# EAGLE board Layout PCB minilab (EAGLE 9.7.0)
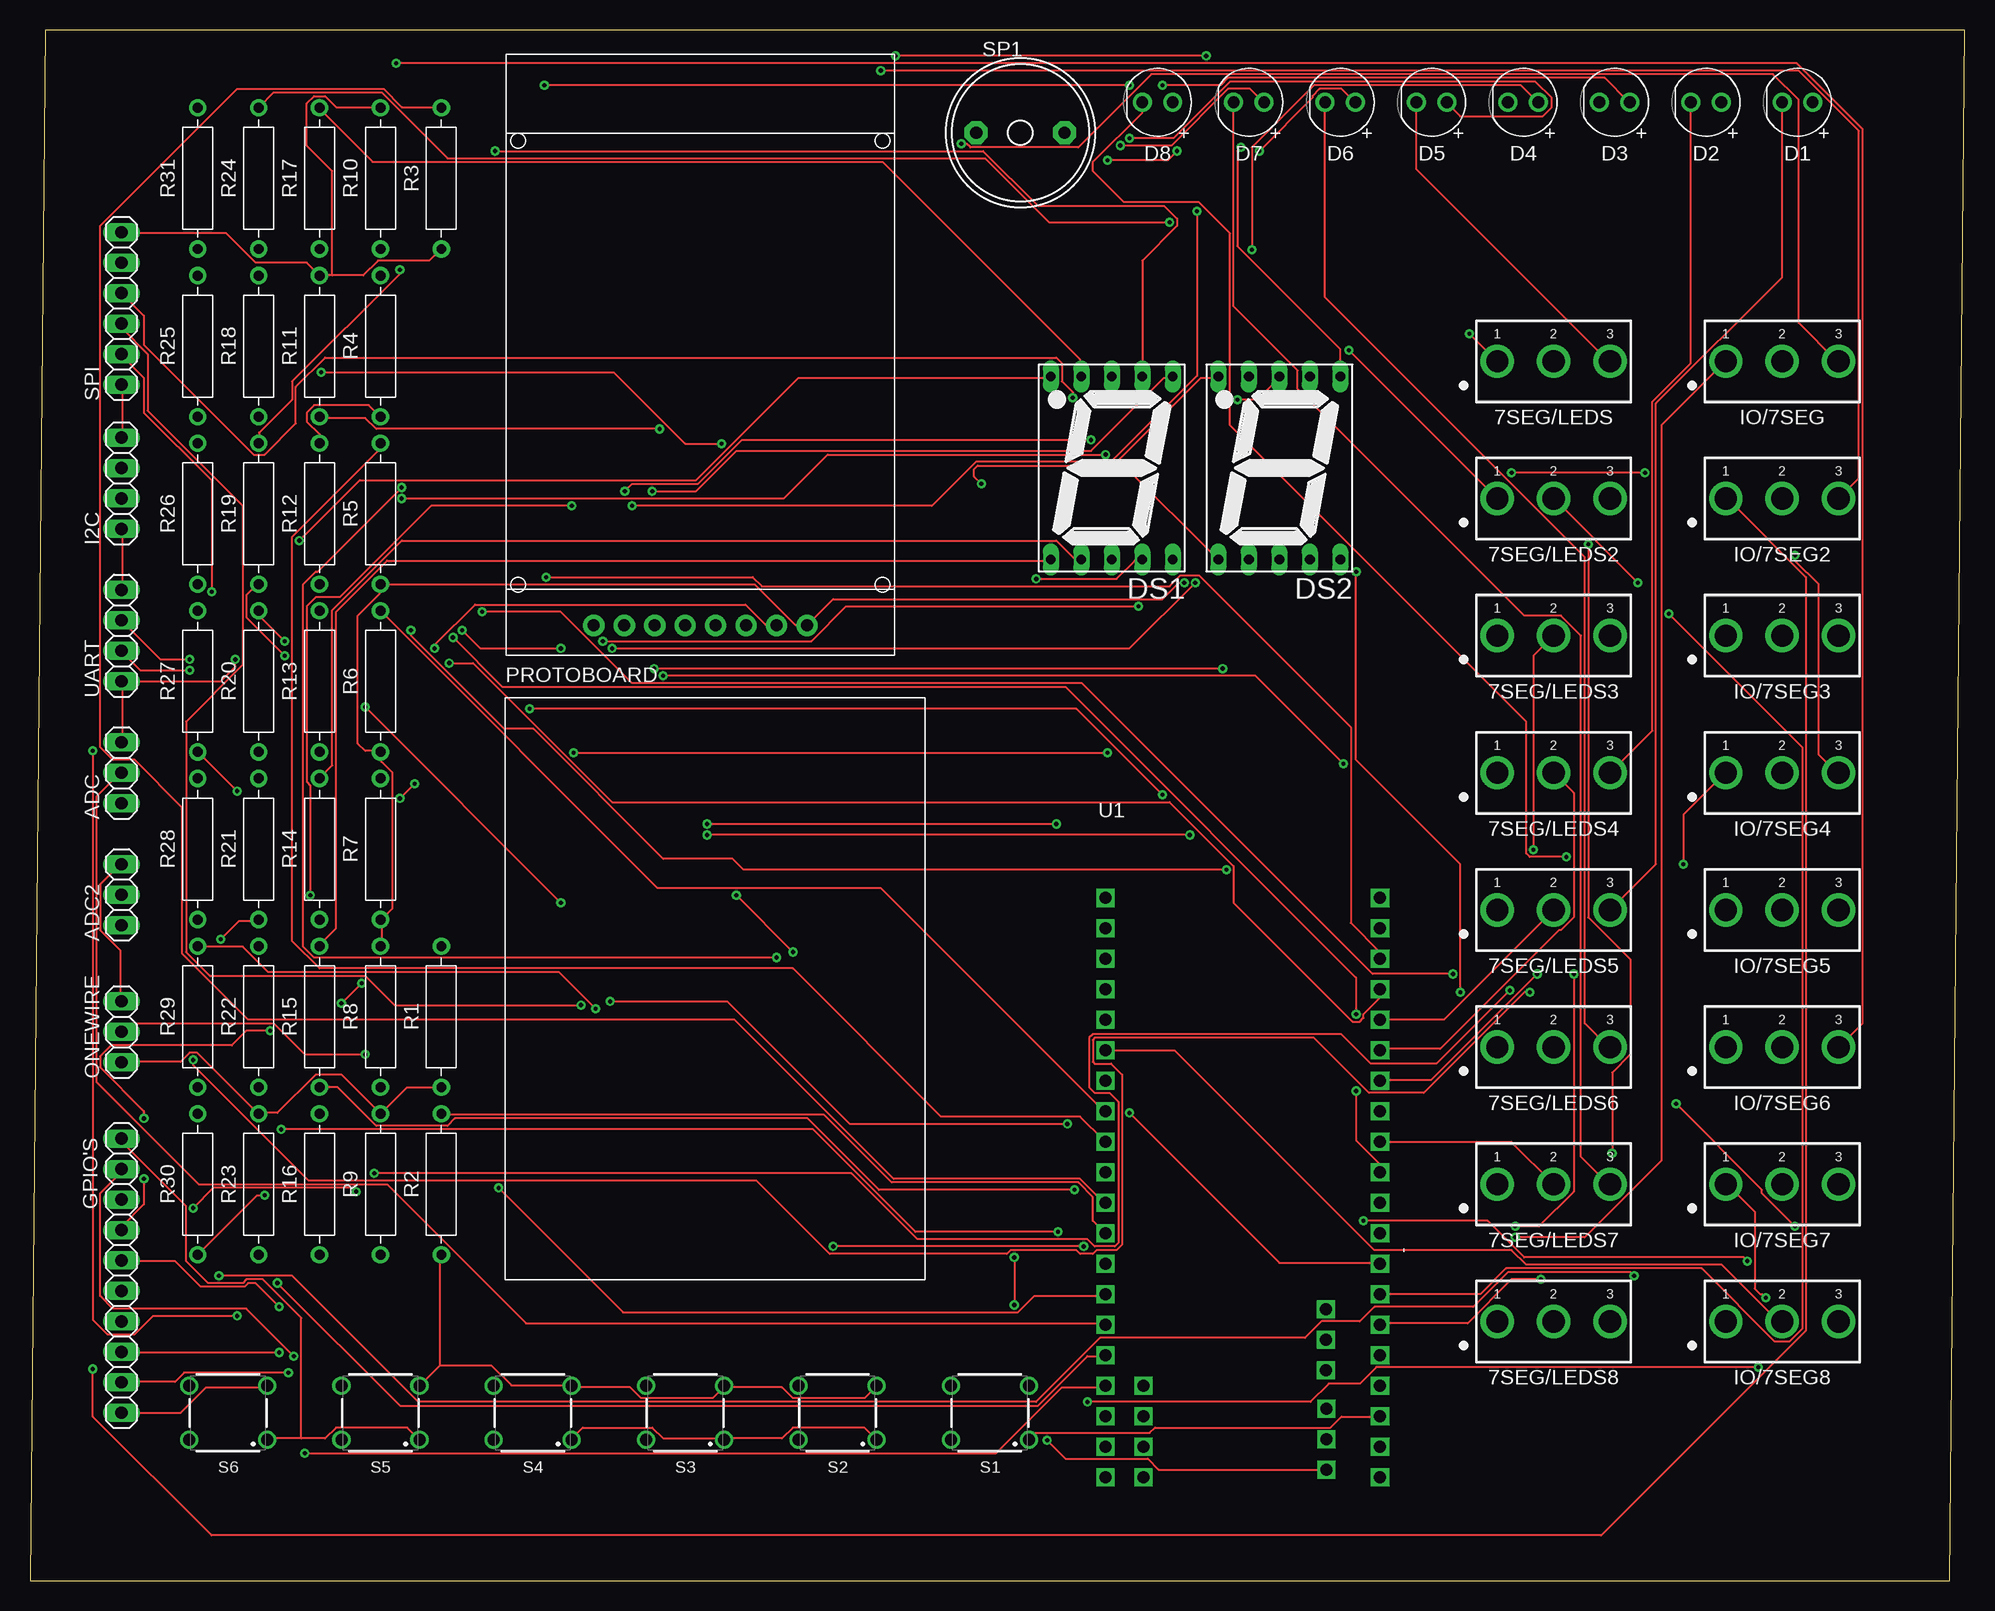
[diagram p0: board, top side]
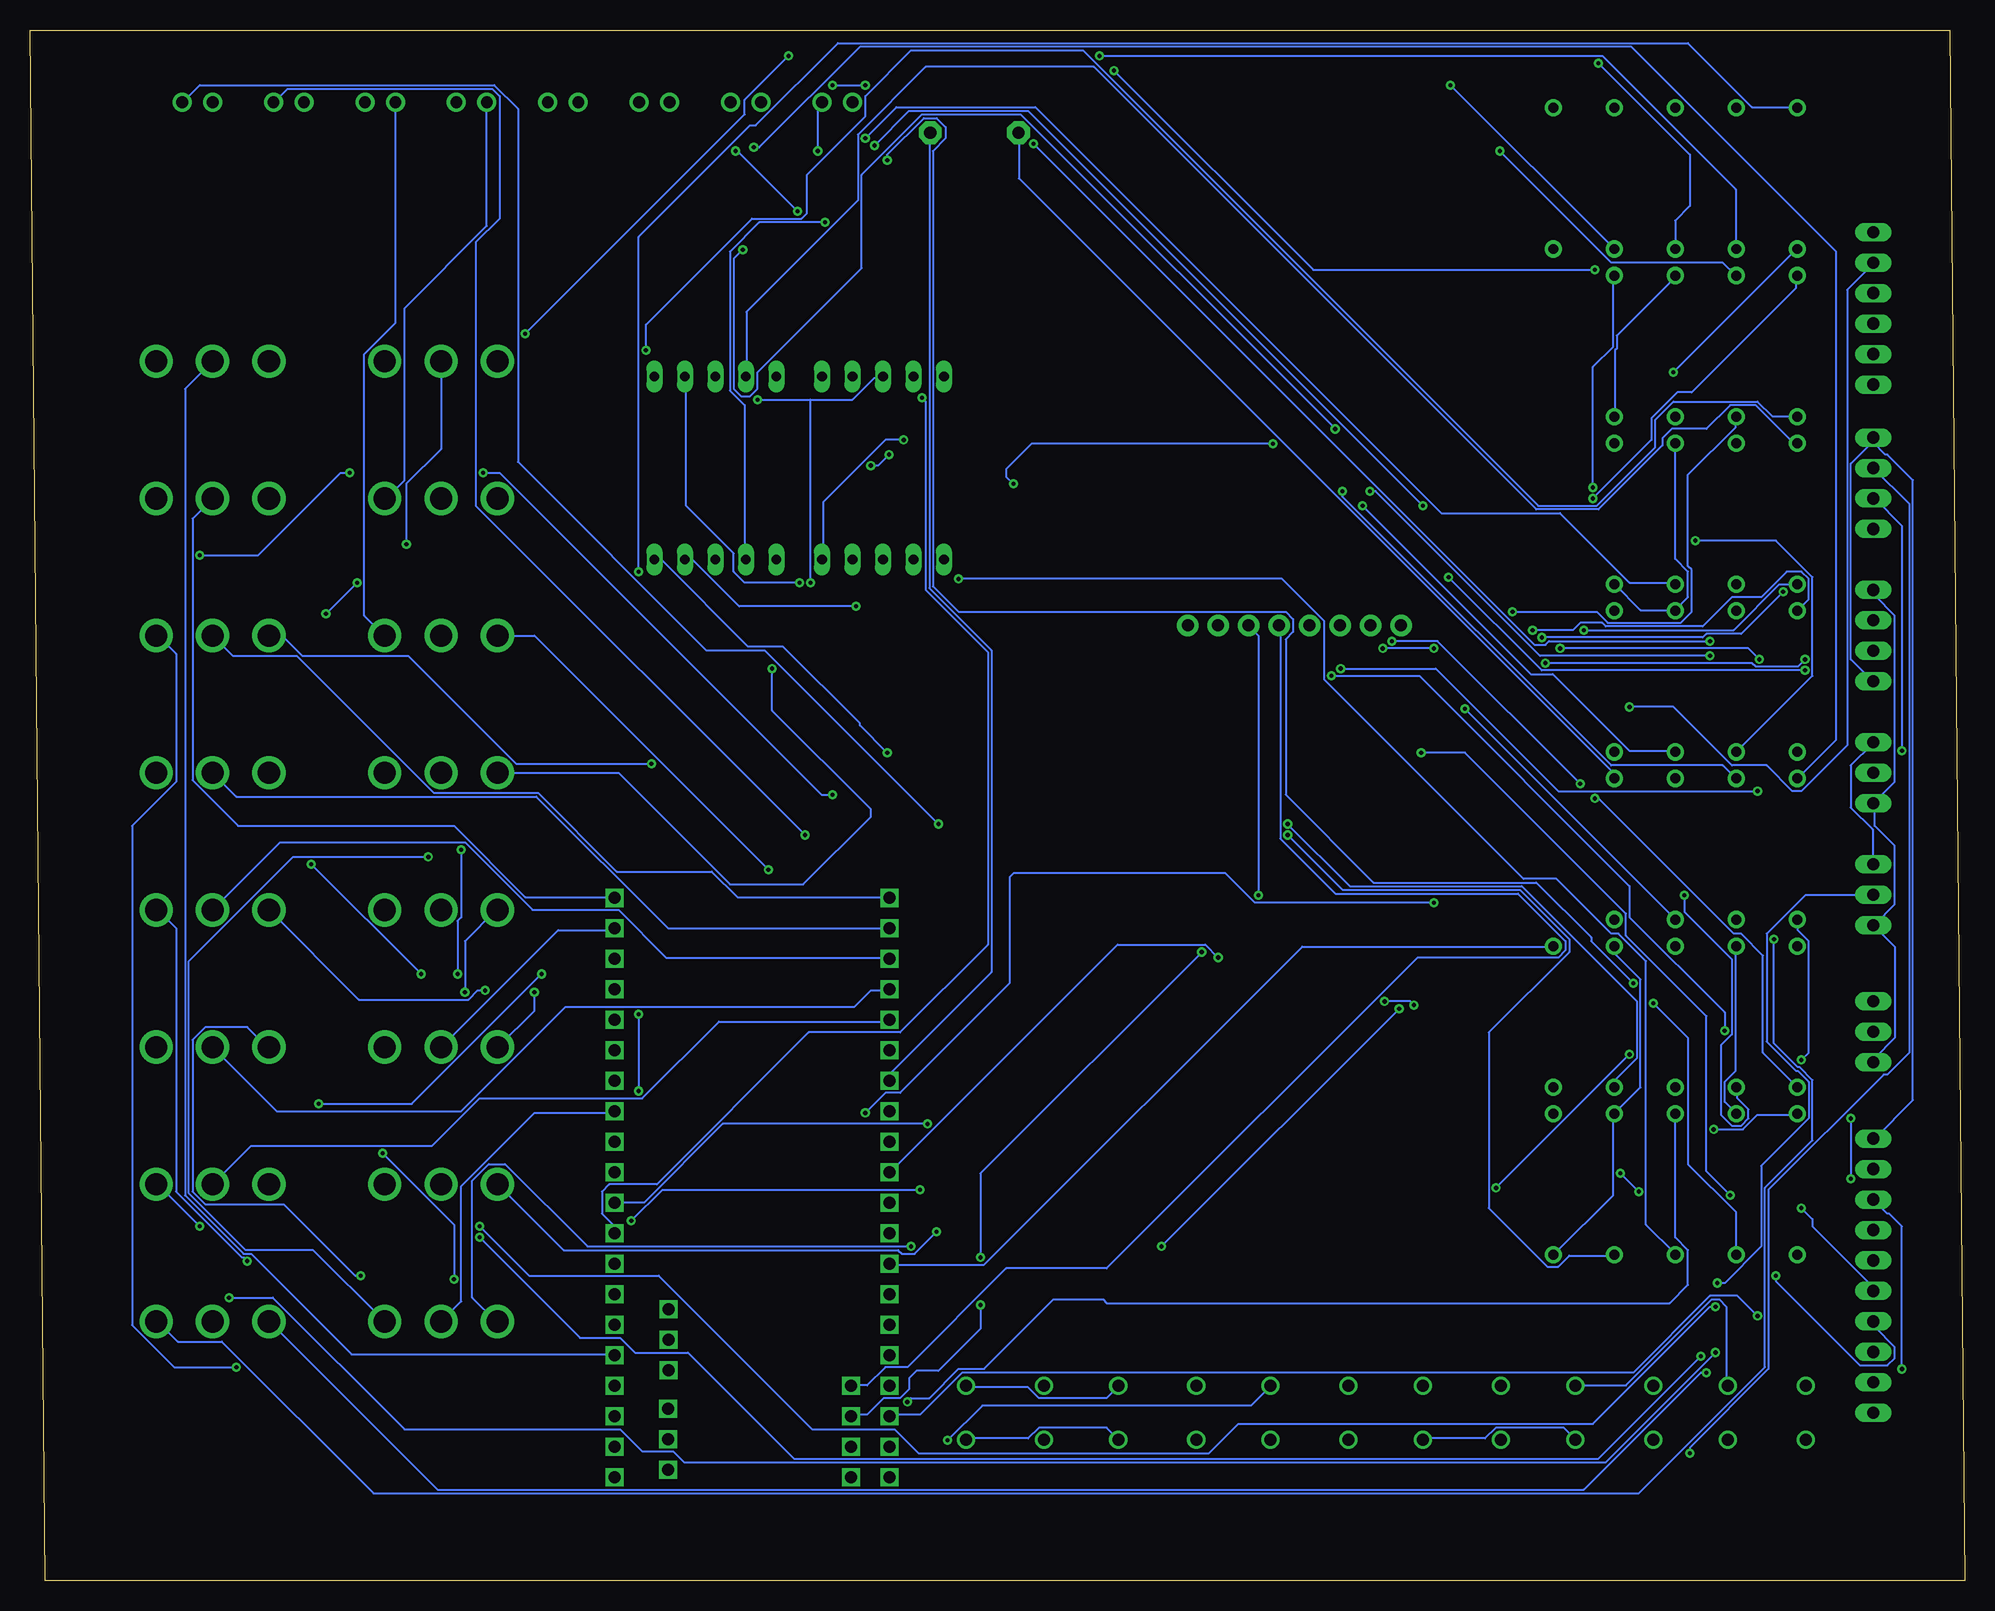
[diagram p1: board, bottom side, seen from below]

Size 161.27 x 129.21 mm. Coordinates in mm from the lower left corner, seen from the top.
Outline: 0,0 160,0 161.27,129.21 1.27,129.21 0,0
Copper layers (1*16): Top / Bottom
Stack-up Default Layer Stack: Top User Defined 0.035mm / Dielectric-1 User Defined 1.5mm / Bottom User Defined 0.035mm
Design rules "default": minimum track width 6mil, minimum drill 0.35mm, track to track 6mil, track to pad 6mil, pad to pad 6mil, via to via 6mil, smd to smd 6mil, copper to edge 40mil, drill to drill 6mil, minimum pad ring 10mil, minimum via ring 8mil, stop-mask expansion 4mil, vias tented up to drill 0mil, thermal gap 10mil

## Footprints (pad centres in the part's own frame; a part is rotated, then mirrored left to right if it is on the bottom)
472123010111 = drill 1.85: 1 4.7,0; 2 0,0; 3 -4.7,0
1X03 = drill 1.016 long: 1 -2.54,0; 2 0,0; 3 2.54,0
LEDRD254W60D565H860B = drill 0.981 pad 1.581: 1 -1.27,0; 2 1.27,0
7SEG-13 = drill 0.813 long: 1 -5.08,-7.62; 2 -2.54,-7.62; 3 0,-7.62; 4 2.54,-7.62; 5 5.08,-7.62; 6 5.08,7.62; 7 2.54,7.62; 8 0,7.62; 9 -2.54,7.62; 10 -5.08,7.62
1X10 = drill 1.016 long: 1 -11.43,0; 2 -8.89,0; 3 -6.35,0; 4 -3.81,0; 5 -1.27,0; 6 1.27,0; 7 3.81,0; 8 6.35,0; 9 8.89,0; 10 11.43,0
1X04 = drill 1.016 long: 1 -3.81,0; 2 -1.27,0; 3 1.27,0; 4 3.81,0
RESAD1176W63L850D250B = drill 0.83 pad 1.43: 1 -5.88,0; 2 5.88,0
4301X60507X6 = drill 1: 1 -3.25,2.25; 2 -3.25,-2.25; 3 3.25,2.25; 4 3.25,-2.25
AL11P = drill 1.016 pad 1.905 octagon: + 3.683,0; - -3.683,0
1X06 = drill 1.016 long: 1 -6.35,0; 2 -3.81,0; 3 -1.27,0; 4 1.27,0; 5 3.81,0; 6 6.35,0
FOOTPRINT-FRANZININHO = drill 1 square: P$1 -12.43,17.51; P$2 -12.43,14.97; P$3 -12.43,12.43; P$4 -12.43,9.89; P$5 -12.43,7.35; P$6 -12.43,4.81; P$7 -12.43,2.27; P$8 -12.43,-0.27; P$9 -12.43,-2.81; P$10 -12.43,-5.35; P$11 -12.43,-7.89; P$12 -12.43,-10.43; P$13 -12.43,-12.97; P$14 -12.43,-15.51; P$15 -12.43,-18.05; P$16 -12.43,-20.59; P$17 -12.43,-23.13; P$18 -12.43,-25.67; P$19 -12.43,-28.21; P$20 -12.43,-30.75; P$21 10.48,17.51; P$22 10.48,14.97; P$23 10.48,12.43; P$24 10.48,9.89; P$25 10.48,7.35; P$26 10.48,4.81; P$27 10.48,2.27; P$28 10.48,-0.27; P$29 10.48,-2.81; P$30 10.48,-5.35; P$31 10.48,-7.89; P$32 10.48,-10.43; P$33 10.48,-12.97; P$34 10.48,-15.51; P$35 10.48,-18.05; P$36 10.48,-20.59; P$37 10.48,-23.13; P$38 10.48,-25.67; P$39 10.48,-28.21; P$40 10.48,-30.75; P$41 -9.24,-23.13; P$42 -9.24,-25.67; P$43 -9.24,-28.21; P$44 -9.24,-30.75; P$45 6.01,-25.07; P$46 6.01,-27.61; P$47 6.01,-30.15; P$48 5.97,-16.78; P$49 5.97,-19.32; P$50 5.97,-21.86
1.44-TFT-V1.1 = drill 1 pad 1.778: BLK 0,17.78; CS 0,15.24; DC 0,12.7; GND 0,0; RESET 0,10.16; SCL 0,5.08; SDA 0,7.62; VCC 0,2.54

## Placement (x,y rotation side)
7SEG/LEDS  472123010111  [472123010111]  127,101.6 180 top
7SEG/LEDS2  472123010111  [472123010111]  127,90.17 180 top
7SEG/LEDS3  472123010111  [472123010111]  127,78.74 180 top
7SEG/LEDS4  472123010111  [472123010111]  127,67.31 180 top
7SEG/LEDS5  472123010111  [472123010111]  127,55.88 180 top
7SEG/LEDS6  472123010111  [472123010111]  127,44.45 180 top
7SEG/LEDS7  472123010111  [472123010111]  127,33.02 180 top
7SEG/LEDS8  472123010111  [472123010111]  127,21.59 180 top
ADC  PINHD-1X3  [1X03]  7.62,67.31 90 top
ADC2  PINHD-1X3  [1X03]  7.62,57.15 90 top
D1  LED_RED  [LEDRD254W60D565H860B]  147.32,123.19 180 top
D2  LED_RED  [LEDRD254W60D565H860B]  139.7,123.19 180 top
D3  LED_RED  [LEDRD254W60D565H860B]  132.08,123.19 180 top
D4  LED_RED  [LEDRD254W60D565H860B]  124.46,123.19 180 top
D5  LED_RED  [LEDRD254W60D565H860B]  116.84,123.19 180 top
D6  LED_RED  [LEDRD254W60D565H860B]  109.22,123.19 180 top
D7  LED_RED  [LEDRD254W60D565H860B]  101.6,123.19 180 top
D8  LED_RED  [LEDRD254W60D565H860B]  93.98,123.19 180 top
DS1  7SEG-CK  [7SEG-13]  90.17,92.71 180 top
DS2  7SEG-CK  [7SEG-13]  104.14,92.71 180 top
GPIO'S  PINHD-1X10  [1X10]  7.62,25.4 270 top
I2C  PINHD-1X4  [1X04]  7.62,91.44 90 top
IO/7SEG  472123010111  [472123010111]  146.05,101.6 180 top
IO/7SEG2  472123010111  [472123010111]  146.05,90.17 180 top
IO/7SEG3  472123010111  [472123010111]  146.05,78.74 180 top
IO/7SEG4  472123010111  [472123010111]  146.05,67.31 180 top
IO/7SEG5  472123010111  [472123010111]  146.05,55.88 180 top
IO/7SEG6  472123010111  [472123010111]  146.05,44.45 180 top
IO/7SEG7  472123010111  [472123010111]  146.05,33.02 180 top
IO/7SEG8  472123010111  [472123010111]  146.05,21.59 180 top
ONEWIRE  PINHD-1X3  [1X03]  7.62,45.72 90 top
PROTOBOARD  MINI-PROTOBOARD  [PROTOBOARDFOOTPRINT]  54.61,68.58 0 top
R1  [RESAD1176W63L850D250B]  34.29,46.99 90 top
R2  [RESAD1176W63L850D250B]  34.29,33.02 90 top
R3  [RESAD1176W63L850D250B]  34.29,116.84 90 top
R4  [RESAD1176W63L850D250B]  29.21,102.87 90 top
R5  [RESAD1176W63L850D250B]  29.21,88.9 90 top
R6  [RESAD1176W63L850D250B]  29.21,74.93 90 top
R7  [RESAD1176W63L850D250B]  29.21,60.96 90 top
R8  [RESAD1176W63L850D250B]  29.21,46.99 90 top
R9  [RESAD1176W63L850D250B]  29.21,33.02 90 top
R10  [RESAD1176W63L850D250B]  29.21,116.84 90 top
R11  [RESAD1176W63L850D250B]  24.13,102.87 90 top
R12  [RESAD1176W63L850D250B]  24.13,88.9 90 top
R13  [RESAD1176W63L850D250B]  24.13,74.93 90 top
R14  [RESAD1176W63L850D250B]  24.13,60.96 90 top
R15  [RESAD1176W63L850D250B]  24.13,46.99 90 top
R16  [RESAD1176W63L850D250B]  24.13,33.02 90 top
R17  [RESAD1176W63L850D250B]  24.13,116.84 90 top
R18  [RESAD1176W63L850D250B]  19.05,102.87 90 top
R19  [RESAD1176W63L850D250B]  19.05,88.9 90 top
R20  [RESAD1176W63L850D250B]  19.05,74.93 90 top
R21  [RESAD1176W63L850D250B]  19.05,60.96 90 top
R22  [RESAD1176W63L850D250B]  19.05,46.99 90 top
R23  [RESAD1176W63L850D250B]  19.05,33.02 90 top
R24  [RESAD1176W63L850D250B]  19.05,116.84 90 top
R25  [RESAD1176W63L850D250B]  13.97,102.87 90 top
R26  [RESAD1176W63L850D250B]  13.97,88.9 90 top
R27  [RESAD1176W63L850D250B]  13.97,74.93 90 top
R28  [RESAD1176W63L850D250B]  13.97,60.96 90 top
R29  [RESAD1176W63L850D250B]  13.97,46.99 90 top
R30  [RESAD1176W63L850D250B]  13.97,33.02 90 top
R31  [RESAD1176W63L850D250B]  13.97,116.84 90 top
S1  [4301X60507X6]  80.01,13.97 180 top
S2  [4301X60507X6]  67.31,13.97 180 top
S3  [4301X60507X6]  54.61,13.97 180 top
S4  [4301X60507X6]  41.91,13.97 180 top
S5  [4301X60507X6]  29.21,13.97 180 top
S6  [4301X60507X6]  16.51,13.97 180 top
SP1  AL11P  [AL11P]  82.55,120.65 0 top
SPI  PINHD-1X6  [1X06]  7.62,106.02 90 top
U1  FRANZININHOWIFI  [FOOTPRINT-FRANZININHO]  102.06,39.37 0 top
U$1  1.44"-TFT-V1.1  [1.44-TFT-V1.1]  64.77,79.6 90 top
UART  PINHD-1X4  [1X04]  7.62,78.74 90 top

## Library data of the parts
7SEG/LEDS 7SEG/LEDS2-7SEG/LEDS8 IO/7SEG IO/7SEG2-IO/7SEG8 = Wurth_Switch_WS-TOTV; ACTUATOR-LENGTH: 10.7mm; BUSHING-LENGTH: 9mm; DATASHEET-URL: https://www.we-online.com/redexpert/spec/472123010111?ae; MOUNT: THT; PART-NUMBER: 472123010111; SWITCHING-FUNCTION: ON-OFF-ON
ADC ADC2 GPIO'S I2C ONEWIRE SPI UART = Connector; CATEGORY: CONNECTOR; SUB-CATEGORY: PIN-HEADER
D1-D8 = Opto-Electronic; CATEGORY: Opto-Electronic; SUB-CATEGORY: LED
DS1 DS2 = Opto-Electronic; CATEGORY: Opto-Electronic; SUB-CATEGORY: Display; TYPE: 7-Segment
PROTOBOARD = MiniProtoboardLibrary
R1-R31 = Resistor; CATEGORY: Resistor; SUB-CATEGORY: Fixed
S1-S6 = Wurth_Switch_WS-TATV; DATASHEET-URL: https://www.we-online.com/catalog/datasheet/430156050726.pdf; H: 5.0mm; OPERATION-FORCE: 260g; PART-NUMBER: 430156050726; QTY: 200
SP1 = buzzer; OC_FARNELL: unknown; OC_NEWARK: unknown
U1 = Biblioteca Franzininho
U$1 = Biblioteca LCD

## Nets
3V3: U1.P$19
3V3_MALE: U1.P$43
5V_MALE: U1.P$48
5V_MALE1: U1.P$45
GND: U1.P$20
GND1: U1.P$39
GND2: U1.P$40
GND_MALE: U1.P$44
GND_MALE1: U1.P$49
GND_MALE2: U1.P$50
GND_MALE3: U1.P$46
N$1: R7.2 SP1.-
N$2: ADC2.1 ADC.1 DS1.3 DS2.3 GPIO'S.10 I2C.1 ONEWIRE.1 R1.1 R2.1 R3.1 R4.1 R5.1 R6.1 R7.1 R8.2 R9.2 R10.2 R11.2 R12.2 R13.2 R22.2 R23.2 S1.2 S2.2 S3.2 S4.2 S5.2 S6.2 SPI.6 U1.P$47 U$1.GND UART.4
N$3: R6.2 U1.P$8
N$4: 7SEG/LEDS4.2 U1.P$26
N$5: 7SEG/LEDS3.2 U1.P$27
N$6: R5.2 U1.P$9
N$7: 7SEG/LEDS.2 U1.P$35
N$8: 7SEG/LEDS2.2 U1.P$34
N$9: 7SEG/LEDS6.2 U1.P$22
N$10: R4.2 U1.P$10
N$11: R3.2 U1.P$11
N$12: R2.2 U1.P$12
N$13: R1.2 U1.P$13
N$14: U1.P$41 U$1.SDA
N$15: I2C.3 U1.P$17
N$16: ADC2.2 U1.P$16
N$17: 7SEG/LEDS5.2 U1.P$25
N$18: D1.1 R8.1
N$19: D2.1 R9.1
N$20: D3.1 R10.1
N$21: D4.1 R11.1
N$22: D5.1 R12.1
N$23: D6.1 R13.1
N$24: I2C.2 U1.P$18
N$25: U1.P$24 UART.3
N$26: U1.P$23 UART.2
N$27: SPI.2 U1.P$30
N$28: SPI.3 U1.P$31
N$29: SPI.4 U1.P$32
N$30: SPI.5 U1.P$33
N$31: D8.1 R23.1
N$32: ADC.2 U1.P$15
N$33: ONEWIRE.2 U1.P$14
N$34: SP1.+ U1.P$7
N$35: DS1.7 R14.2
N$36: IO/7SEG8.2 U1.P$6
N$37: IO/7SEG7.2 U1.P$5
N$38: DS1.6 R15.2
N$39: IO/7SEG3.2 U1.P$1
N$40: IO/7SEG6.2 U1.P$4
N$41: IO/7SEG5.2 U1.P$3
N$42: DS1.4 R17.2
N$43: DS1.2 R18.2
N$44: DS1.1 R21.2
N$45: IO/7SEG4.2 U1.P$2
N$46: DS1.9 R16.1
N$47: DS1.10 R19.1
N$48: IO/7SEG2.2 U1.P$21
N$49: DS1.5 R20.1
N$50: IO/7SEG.2 U1.P$36
N$51: ADC2.3 ADC.3 GPIO'S.1 I2C.4 ONEWIRE.3 S1.1 S2.1 S3.1 S4.1 S5.1 S6.1 SPI.1 U1.P$38 U$1.VCC UART.1
N$52: D7.1 R22.1
N$53: 7SEG/LEDS7.2 U1.P$29
N$54: 7SEG/LEDS8.2 U1.P$28
N$55: 7SEG/LEDS8.3 D8.2
N$56: DS2.2 R27.2
N$57: DS2.4 R26.2
N$58: DS2.6 R25.2
N$59: DS2.7 R24.2
N$60: DS2.1 R28.2
N$61: DS2.9 R29.1
N$62: DS2.10 R30.1
N$63: DS2.5 R31.1
N$64: 7SEG/LEDS.1 R24.1
N$65: 7SEG/LEDS2.1 R25.1
N$66: 7SEG/LEDS3.1 R26.1
N$67: 7SEG/LEDS4.1 R27.1
N$68: 7SEG/LEDS5.1 R28.1
N$69: 7SEG/LEDS6.1 R31.2
N$70: 7SEG/LEDS7.1 R30.2
N$71: 7SEG/LEDS8.1 R29.2
N$72: 7SEG/LEDS7.3 D7.2
N$73: 7SEG/LEDS6.3 D6.2
N$75: 7SEG/LEDS5.3 D1.2
N$76: 7SEG/LEDS4.3 D2.2
N$77: 7SEG/LEDS3.3 D3.2
N$78: 7SEG/LEDS2.3 D4.2
N$79: 7SEG/LEDS.3 D5.2
N$80: IO/7SEG7.3 R18.1
N$81: IO/7SEG6.3 R17.1
N$82: IO/7SEG5.3 R15.1
N$83: IO/7SEG4.3 R14.1
N$84: IO/7SEG8.3 R21.1
N$85: GPIO'S.9 IO/7SEG8.1
N$86: GPIO'S.8 IO/7SEG7.1
N$87: GPIO'S.7 IO/7SEG6.1
N$88: GPIO'S.6 IO/7SEG5.1
N$89: GPIO'S.5 IO/7SEG4.1
N$90: IO/7SEG3.3 R16.2
N$91: IO/7SEG2.3 R19.2
N$92: IO/7SEG.3 R20.2
N$93: GPIO'S.4 IO/7SEG3.1
N$94: GPIO'S.3 IO/7SEG2.1
N$95: GPIO'S.2 IO/7SEG.1
N$96: U1.P$42 U$1.SCL

## Tracks (layer width: path | path; a pad name or v marks a point on that pad's centre or on a via)
N$1
  Bottom 0.152: R7.2 29.31,66.85 29.31,67.31 78.84,116.84 78.84,120.65 SP1.-
N$2  (via drill 0.35)
  Top 0.152: R12.2 24.13,95.5 23.06,96.57 23.06,97.33 23.67,97.94 28.25,97.94 29.16,97.03 R4.1 | 25.2,108.76 27.79,108.76 29.01,109.98 33.27,109.98 34.19,110.9 R3.1 | 25.2,108.76 24.13,108.76 | 25.2,108.76 25.2,117.45 23.06,119.58 23.06,123.09 23.67,123.7 24.59,123.7 25.5,122.78 29.16,122.78 R10.2 | 24.13,108.76 23.06,109.83 18.8,109.83 16.36,112.27 7.67,112.27 SPI.6 | 24.13,108.76 R11.2 | v100.63,98.4 102.31,98.4 104.14,100.23 DS2.3 | v96.21,83.16 95.76,83.16 94.39,81.79 66.95,81.79 64.82,79.65 U$1.GND 64.67,79.65 63.75,79.65 60.4,83.01 29.31,83.01 R5.1 29.16,83.01 29.16,82.25 27.33,80.42 27.33,69.75 27.94,69.14 29.16,69.14 R6.1 29.31,68.99 29.31,68.22 30.23,67.31 30.23,56.03 29.31,55.12 R7.1 29.31,54.97 29.31,52.98 R8.2 | UART.4 7.67,82.55 7.67,87.58 I2C.1 | R1.1 34.19,41.1 31.45,41.1 29.31,38.96 R9.2 29.16,38.96 25.96,42.16 23.82,42.16 20.62,38.96 19.1,38.96 R23.2 18.95,38.96 13.92,43.99 13.31,43.99 12.55,43.23 7.67,43.23 ONEWIRE.1 | GPIO'S.10 12.55,13.97 14.68,16.1 19.71,16.1 S6.2 | 34.19,17.93 34.19,27.08 R2.1 | 34.19,17.93 32.51,16.26 S5.2 | 34.19,17.93 38.46,17.93 40.13,16.26 45.01,16.26 S4.2 45.16,16.1 50.04,16.1 50.95,15.19 56.9,15.19 57.81,16.1 S3.2 57.96,16.1 62.69,16.1 63.6,15.19 69.55,15.19 70.46,16.1 S2.2 | v84.78,11.68 86.31,10.16 93.17,10.16 94.08,9.25 107.95,9.25 U1.P$47
  Bottom 0.152: R4.1 29.16,97.03 29.16,102.51 29.01,102.67 29.01,103.73 24.13,108.61 R11.2 | v100.63,98.4 96.21,98.4 | 96.21,98.4 92.71,98.4 90.88,100.23 90.27,100.23 DS1.3 | 24.13,80.87 27.03,80.87 29.16,83.01 R5.1 | v96.21,83.16 96.21,98.4 | R12.2 24.13,85.14 23.06,84.07 23.06,81.94 24.13,80.87 | 24.13,80.87 R13.2 | ONEWIRE.1 7.52,43.23 7.52,43.54 5.84,45.21 5.84,52.83 ADC2.1 7.52,54.66 5.84,56.34 5.84,61.21 7.52,62.89 7.52,64.72 ADC.1 5.84,66.55 5.84,80.42 7.52,82.09 7.52,82.55 UART.4 | R22.2 19.1,52.83 19.1,42.47 20.02,41.55 20.02,39.88 19.1,38.96 R23.2 | R8.2 29.16,52.83 29.16,52.22 27.03,50.09 27.03,41.1 29.16,38.96 R9.2 29.31,38.81 29.31,32.11 34.19,27.23 R2.1 | S6.2 19.86,16.26 19.86,22.81 20.47,23.42 21.08,23.42 28.25,16.26 32.36,16.26 S5.2 | S1.2 83.11,16.1 78.08,16.1 77.16,15.19 71.53,15.19 70.61,16.1 S2.2 | v84.78,11.68 81.89,14.58 59.49,14.58 57.96,16.1 S3.2
N$3
  Top 0.152: R6.2 29.31,80.72 52.32,57.71 70.92,57.71 89.51,39.12 U1.P$8
N$4
  Top 0.152: 7SEG/LEDS4.2 128.68,65.63 128.68,55.27 127.61,54.2 127.46,54.2 117.55,44.3 112.67,44.3 U1.P$26
N$5  (via drill 0.35)
  Top 0.152: v125.63,50.55 116.79,41.71 112.67,41.71 U1.P$27 | v125.32,60.91 125.32,77.06 7SEG/LEDS3.2
  Bottom 0.152: v125.63,50.55 125.63,54.97 125.32,55.27 v125.32,60.91
N$6
  Top 0.152: R5.2 29.16,94.74 29.16,94.28 21.84,86.97 21.84,53.29 24.13,51 63.6,51 75.95,38.66 87.53,38.66 89.51,36.68 U1.P$9
N$7  (via drill 0.35)
  Top 0.152: v125.93,25.09 123.49,25.09 119.84,21.44 112.67,21.44 U1.P$35 | v131.88,35.61 131.88,42.32 133.4,43.84 133.4,51.77 129.9,55.27 v129.9,86.36
  Bottom 0.152: v125.93,25.09 125.93,29.67 v131.88,35.61 | v129.9,86.36 129.9,91.39 127,94.28 7SEG/LEDS.2
N$8  (via drill 0.35)
  Top 0.152: v136.6,80.57 147.73,69.44 147.73,20.98 146.66,19.91 145.44,19.91 139.34,26.01 123.04,26.01 120.9,23.88 112.67,23.88 U1.P$34 | 7SEG/LEDS2.2 v134.01,83.16
  Bottom 0.152: v134.01,83.16 v136.6,80.57
N$9
  Bottom 0.152: 7SEG/LEDS6.2 117.25,54.2 112.67,54.2 U1.P$22
N$10  (via drill 0.35)
  Top 0.152: v30.99,91.08 23.98,84.07 23.82,84.07 22.76,83.01 22.76,52.83 23.67,51.92 v62.23,51.92
  Bottom 0.152: v30.99,91.08 30.99,101.14 29.31,102.82 29.31,108.61 R4.2 | v62.23,51.92 63.3,52.98 70.61,52.98 89.51,34.09 U1.P$10
N$11
  Top 0.152: R3.2 34.19,122.78 30.99,122.78 29.46,124.31 17.27,124.31 5.84,112.88 5.84,69.44 6.91,68.38 8.74,68.38 12.7,64.41 12.7,52.22 18.19,46.74 58.73,46.74 71.98,33.48 87.53,33.48 89.51,31.5 U1.P$11
N$12
  Top 0.152: R2.2 34.34,38.81 66.19,38.81 71.83,33.17 87.38,33.17 88.59,31.95 88.59,29.97 89.51,29.06 U1.P$12
N$13
  Bottom 0.152: R1.2 34.34,52.83 55.22,52.83 81.74,26.31 89.51,26.31 U1.P$13
N$14
  Bottom 0.152: U1.P$41 92.71,16.26 91.49,16.26 89.97,17.78 88.14,17.78 79.91,26.01 71.53,26.01 45.62,51.92 33.88,51.92 33.27,52.53 33.27,53.29 37.24,57.25 52.48,57.25 57.05,61.82 57.05,79.5 U$1.SDA
N$15  (via drill 0.35)
  Top 0.152: v22.91,10.62 80.52,10.62 86,16.1 89.51,16.1 U1.P$17
  Bottom 0.152: v22.91,10.62 22.91,11.07 16.36,17.63 16.36,32.56 6.76,42.16 6.45,42.16 4.62,43.99 4.62,89.71 I2C.3
N$16  (via drill 0.35)
  Top 0.152: v20.62,24.79 30.84,14.58 84.02,14.58 88.14,18.69 89.51,18.69 U1.P$16
  Bottom 0.152: v20.62,24.79 20.02,24.79 16.97,27.84 16.97,34.54 13,38.51 13,41.55 13.92,42.47 14.07,42.47 16.51,44.91 16.51,53.9 13.31,57.1 7.67,57.1 ADC2.2
N$17
  Top 0.152: 7SEG/LEDS5.2 117.86,46.74 112.67,46.74 U1.P$25
N$18  (via drill 0.35)
  Top 0.152: v85.55,63.04 v56.44,63.04
  Bottom 0.152: v56.44,63.04 51.26,57.86 36.93,57.86 27.33,48.26 27.33,43.54 29.16,41.71 29.16,41.25 R8.1 | v85.55,63.04 100.02,77.52 104.9,77.52 120.6,93.22 120.6,122.63 122.58,124.61 147.12,124.61 148.49,123.24 D1.1
N$19  (via drill 0.35)
  Top 0.152: v96.67,62.13 v56.44,62.13
  Bottom 0.152: v56.44,62.13 51.87,57.56 37.08,57.56 32.97,53.44 32.97,52.38 39.68,45.67 39.68,31.04 34.8,26.16 33.88,26.16 32.97,27.08 29.31,27.08 R9.1 | v96.67,62.13 124.1,89.56 124.1,111.51 122.12,113.49 122.12,123.7 122.73,124.31 139.8,124.31 140.87,123.24 D2.1
N$20  (via drill 0.35)
  Top 0.152: v91.64,124.61 v42.88,124.61 | v94.39,124.61 99.26,124.61 99.87,125.22 131.27,125.22 133.25,123.24 D3.1
  Bottom 0.152: v42.88,124.61 29.31,111.05 R10.1 | v94.39,124.61 v91.64,124.61
N$21  (via drill 0.35)
  Top 0.152: v52.48,95.96 28.85,95.96 27.94,96.88 24.13,96.88 R11.1 | v101.85,110.9 101.85,119.43 107.04,124.61 124.26,124.61 125.63,123.24 D4.1
  Bottom 0.152: v52.48,95.96 78.69,122.17 86.92,122.17 91.95,117.15 91.95,109.37 100.63,100.69 100.63,99.31 101.24,98.7 102.01,98.7 102.62,99.31 102.62,110.13 v101.85,110.9
N$22  (via drill 0.35)
  Top 0.152: v91.64,120.19 95.3,120.19 100.02,124.92 125.48,124.92 126.85,123.55 126.85,122.78 126.09,122.02 119.23,122.02 118.16,123.09 D5.1
  Bottom 0.152: v91.64,120.19 89.05,122.78 77.47,122.78 43.64,88.95 33.73,88.95 27.94,83.16 24.13,83.16 R12.1
N$23  (via drill 0.35)
  Top 0.152: v50.19,89.56 75.18,89.56 78.84,93.22 90.12,93.22 97.28,100.38 v97.28,114.1 | v102.46,119.13 106.88,123.55 106.88,123.7 107.49,124.31 109.32,124.31 110.39,123.24 D6.1
  Bottom 0.152: v50.19,89.56 36.17,75.54 34.34,75.54 27.94,69.14 24.13,69.14 R13.1 | v97.28,114.1 102.31,119.13 v102.46,119.13
N$24  (via drill 0.35)
  Top 0.152: v17.27,22.05 10.26,22.05 8.74,20.52 6.45,20.52 5.23,21.74 v5.23,69.14
  Bottom 0.152: v17.27,22.05 18.95,23.72 21.23,23.72 27.63,17.32 83.57,17.32 87.07,13.82 89.51,13.82 U1.P$18 | v5.23,69.14 5.23,87.88 7.52,90.17 I2C.2
N$25  (via drill 0.35)
  Top 0.152: v34.95,76.45 36.93,76.45 48.51,64.87 95,64.87 100.33,59.54 100.33,56.49 110.24,46.58 110.85,46.58 111.15,46.89 111.15,47.19 112.52,48.56 112.52,49.17 U1.P$24 | v13.31,76.76 10.87,76.76 UART.3
  Bottom 0.152: v34.95,76.45 17.73,76.45 17.42,76.15 13.92,76.15 v13.31,76.76
N$26  (via drill 0.35)
  Top 0.152: v43.03,83.62 60.25,83.62 61.01,82.86 95,82.86 95.91,83.77 97.43,83.77 110.08,71.12 110.08,54.81 112.52,52.38 112.52,51.92 U1.P$23 | v13.31,75.84 9.2,75.84 7.67,77.37 UART.2
  Bottom 0.152: v43.03,83.62 35.26,75.84 v13.31,75.84
N$27  (via drill 0.35)
  Top 0.152: v110.54,40.79 110.54,36.68 112.52,34.7 112.52,34.09 U1.P$30 | v110.54,47.19 110.54,50.24 86.31,74.47 39.37,74.47 v35.26,78.59 | v15.14,82.4 15.14,91.69 9.5,97.33 9.5,100.23 7.67,102.06 SPI.2
  Bottom 0.152: v110.54,47.19 v110.54,40.79 | v35.26,78.59 21.84,78.59 21.54,78.89 18.64,78.89 v15.14,82.4
N$28  (via drill 0.35)
  Top 0.152: v86.46,38.05 68.33,38.05 58.12,48.26 v48.36,48.26 | v45.92,47.95 30.38,47.95 27.94,50.39 14.99,50.39 13,52.38 13,71.58 17.73,76.3 17.73,89.56 9.8,97.49 9.8,102.21 7.67,104.34 7.67,104.65 SPI.3
  Bottom 0.152: v86.46,38.05 103.53,38.05 110.08,31.5 112.52,31.5 U1.P$31 | v48.36,48.26 46.23,48.26 v45.92,47.95
N$29  (via drill 0.35)
  Top 0.152: v86.92,98.55 86.92,99.01 86,99.92 86,101.45 85.55,101.91 24.59,101.91 22.15,99.47 22.15,96.42 19.56,93.83 18.64,93.83 9.5,102.97 9.5,105.41 7.67,107.24 SPI.4
  Bottom 0.152: v86.92,98.55 86.61,98.25 86.61,82.55 81.43,77.37 81.43,52.98 88.75,45.67 96.37,45.67 109.02,33.02 112.98,33.02 113.59,32.41 113.59,30.58 112.67,29.67 112.67,29.06 U1.P$32
N$30  (via drill 0.35)
  Top 0.152: v91.64,38.96 104.14,26.47 112.52,26.47 U1.P$33 | v27.94,72.8 v44.25,56.49
  Bottom 0.152: v91.64,38.96 89.97,40.64 88.75,40.64 79.6,49.78 79.6,58.62 79.3,58.93 61.62,58.93 59.18,56.49 v44.25,56.49 | v27.94,72.8 24.28,72.8 19.41,67.92 16.51,67.92 14.38,65.79 13.61,65.79 9.8,69.6 9.8,107.54 7.67,109.68 SPI.5
N$31  (via drill 0.35)
  Top 0.152: v27.63,49.78 v25.96,48.11 | v89.81,118.36 94.84,118.36 v95.61,119.13
  Bottom 0.152: v25.96,48.11 23.06,45.21 23.06,34.7 19.1,30.73 19.1,27.23 R23.1 | v27.63,49.78 31.14,53.29 31.14,53.59 35.71,58.17 49.28,58.17 56.59,65.48 56.59,78.44 55.98,79.05 55.98,80.11 56.59,80.72 83.87,80.72 86,82.86 86,119.13 84.94,120.19 84.94,121.11 85.7,121.87 86.77,121.87 89.81,118.82 v89.81,118.36 | v95.61,119.13 95.61,122.78 95.3,123.09 D8.1
N$32
  Top 0.152: U1.P$15 89.51,21.44 41.35,21.44 29.77,33.02 14.07,33.02 5.54,41.55 5.54,65.33 7.52,67.31 ADC.2
N$33  (via drill 0.35)
  Top 0.152: v39.07,32.72 49.43,22.35 82.35,22.35 83.72,23.72 89.51,23.72 U1.P$14 | v27.94,43.84 22.91,43.84 20.32,46.43 8.28,46.43 7.67,45.82 ONEWIRE.2
  Bottom 0.152: v27.94,43.84 v39.07,32.72
N$34
  Bottom 0.152: U1.P$7 89.51,41.71 89.51,42.32 81.13,50.7 81.13,77.52 86.31,82.7 86.31,120.65 SP1.+
N$35
  Top 0.152: DS1.7 87.53,85.14 87.07,85.14 85.55,86.66 30.99,86.66 25.2,80.87 25.2,67.92 24.13,66.85 R14.2
N$36
  Top 0.152: IO/7SEG8.2 145.75,21.59 141.02,26.31 124.71,26.31 123.49,27.53 112.06,27.53 95.45,44.15 89.66,44.15 U1.P$6
N$37
  Bottom 0.152: IO/7SEG7.2 142.85,36.22 127.76,36.22 123.8,40.18 110.24,40.18 103.83,46.58 89.66,46.58 U1.P$5
N$38
  Top 0.152: DS1.6 85.09,84.99 29.77,84.99 25.5,80.72 25.5,54.36 24.13,52.98 R15.2
N$39
  Bottom 0.152: IO/7SEG3.2 144.37,77.06 139.04,77.06 127.61,65.63 118.92,65.63 112.37,59.08 104.44,59.08 102.31,56.95 89.66,56.95 U1.P$1
N$40
  Bottom 0.152: IO/7SEG6.2 140.72,39.12 125.32,39.12 116.64,47.8 92.56,47.8 91.19,49.17 89.66,49.17 U1.P$4
N$41
  Bottom 0.152: IO/7SEG5.2 140.41,61.52 125.02,61.52 119.38,55.88 112.22,55.88 108.25,51.92 89.66,51.92 U1.P$3
N$42
  Top 0.152: DS1.4 87.53,100.38 87.53,101.75 71.07,118.21 28.55,118.21 24.13,122.63 R17.2
N$43  (via drill 0.35)
  Top 0.152: DS1.2 92.71,109.98 95.61,112.88 95.61,113.49 94.54,114.55 84.02,114.55 79.45,119.13 v38.76,119.13
  Bottom 0.152: v38.76,119.13 29.46,109.83 20.17,109.83 19.1,108.76 R18.2
N$44  (via drill 0.35)
  Top 0.152: v51.87,90.78 55.52,90.78 58.88,94.13 88.44,94.13 94.54,100.23 95.15,100.23 DS1.1
  Bottom 0.152: v51.87,90.78 51.87,90.32 29.46,67.92 20.17,67.92 19.1,66.85 R21.2
N$45
  Bottom 0.152: IO/7SEG4.2 144.07,65.33 119.08,65.33 108.1,54.36 89.66,54.36 U1.P$2
N$46  (via drill 0.35)
  Top 0.152: v83.87,83.46 90.58,83.46 92.1,84.99 92.71,84.99 DS1.9
  Bottom 0.152: v83.87,83.46 56.9,83.46 53.39,79.96 53.39,75.08 36.78,58.47 34.04,58.47 29.46,53.9 28.85,53.9 26.57,51.61 26.57,29.67 24.13,27.23 R16.1
N$47  (via drill 0.35)
  Top 0.152: v88.44,95.05 59.33,95.05 55.68,91.39 50.19,91.39 v49.58,90.78 | v21.23,77.06 18.03,80.26 18.03,82.09 18.95,83.01 R19.1
  Bottom 0.152: v88.44,95.05 89.97,95.05 95.15,89.87 95.15,85.14 DS1.10 | v49.58,90.78 49.12,90.78 35.41,77.06 v21.23,77.06
N$48
  Bottom 0.152: IO/7SEG2.2 147.73,88.49 147.73,66.7 143.92,62.89 125.93,62.89 119.99,56.95 112.67,56.95 U1.P$21
N$49  (via drill 0.35)
  Top 0.152: v22.45,86.66 27.48,91.69 55.52,91.69 64.06,100.23 85.09,100.23 DS1.5
  Bottom 0.152: v22.45,86.66 15.75,86.66 12.7,83.62 12.7,75.39 18.95,69.14 R20.1
N$50
  Bottom 0.152: IO/7SEG.2 148.34,99.31 148.34,32.11 143.46,27.23 142.85,27.23 134.47,18.85 112.67,18.85 U1.P$36
N$51  (via drill 0.35)
  Top 0.152: ONEWIRE.3 7.52,48.26 7.52,52.53 5.84,54.2 5.84,58.01 7.52,59.69 ADC2.3 | I2C.4 7.67,95.35 7.67,99.62 SPI.1 | 7.67,74.93 7.67,69.9 ADC.3 | v33.73,77.67 33.73,77.98 37.08,81.33 59.64,81.33 61.32,79.65 62.23,79.65 U$1.VCC | v17.12,76.76 17.12,76.15 15.9,74.93 7.67,74.93 | 7.67,74.93 UART.1 | S2.1 70.46,11.84 69.55,12.75 63.6,12.75 62.69,11.84 57.96,11.84 S3.1 57.81,11.84 52.78,11.84 51.87,12.75 46.08,12.75 45.16,11.84 S4.1 | U1.P$38 112.52,13.67 109.32,13.67 108.41,12.75 93.78,12.75 93.32,12.29 83.72,12.29 83.26,11.84 S1.1 | 22.61,11.84 24.59,11.84 25.5,12.75 31.45,12.75 32.36,11.84 S5.1 | 22.61,11.84 19.86,11.84 S6.1 | 22.61,11.84 22.61,21.89 19.41,25.09 18.03,25.09 17.73,24.79 14.83,24.79 13,26.62 13,31.19 7.67,36.52 7.67,36.83 GPIO'S.1
  Bottom 0.152: v33.73,77.67 18.03,77.67 v17.12,76.76 | 7.67,94.89 7.67,95.2 I2C.4 7.67,94.89 | 7.67,94.89 9.5,93.07 9.5,76.76 7.67,74.93 UART.1 | ADC2.3 7.67,59.69 7.67,62.59 9.5,64.41 9.5,67.92 7.67,69.75 ADC.3 | S1.1 83.11,11.84 78.08,11.84 77.16,12.75 71.53,12.75 70.61,11.84 S2.1 | S4.1 45.01,11.84 39.98,11.84 39.07,12.75 33.43,12.75 32.51,11.84 S5.1 | 7.67,94.89 6.6,93.83 6.45,93.83 4.32,91.69 4.32,40.03 7.52,36.83 GPIO'S.1
N$52  (via drill 0.35)
  Top 0.152: v23.37,57.1 23.37,66.24 23.06,66.55 23.06,81.18 23.82,81.94 25.81,81.94 33.43,89.56 v45.16,89.56 | v90.88,119.58 95.15,119.58 99.87,124.31 101.7,124.31 102.77,123.24 D7.1
  Bottom 0.152: v23.37,57.1 23.37,55.73 19.41,51.77 19.41,45.52 20.32,44.6 20.32,38.81 19.41,37.9 18.64,37.9 18.03,38.51 18.03,39.27 18.95,40.18 18.95,41.1 R22.1 | v45.16,89.56 78.08,122.48 87.99,122.48 v90.88,119.58
N$53
  Top 0.152: 7SEG/LEDS7.2 123.49,36.52 112.67,36.52 U1.P$29
N$54
  Bottom 0.152: 7SEG/LEDS8.2 125.32,23.27 125.32,32.87 119.23,38.96 112.67,38.96 U1.P$28
N$55  (via drill 0.35)
  Top 0.152: D8.2 92.71,122.33 88.59,118.21 88.59,117.45 91.19,114.86 97.43,114.86 100.02,112.27 100.02,96.27 124.71,71.58 124.71,60.6 125.02,60.3 v128.07,60.3
  Bottom 0.152: v128.07,60.3 139.34,60.3 148.03,51.61 148.03,32.26 143.31,27.53 137.67,27.53 131.72,21.59 7SEG/LEDS8.3
N$56  (via drill 0.35)
  Top 0.152: v97.13,83.16 91.64,77.67 v48.51,77.67 | v44.25,77.67 37.54,77.67 v36.02,79.2
  Bottom 0.152: v97.13,83.16 101.7,83.16 102.62,84.07 102.62,85.6 106.58,89.56 106.58,100.23 DS2.2 | v44.25,77.67 v48.51,77.67 | v36.02,79.2 32.66,79.2 32.05,79.81 30.23,79.81 29.92,79.5 21.84,79.5 19.41,81.94 16.97,81.94 14.83,84.07 13.61,84.07 13,83.46 13,81.79 13.92,80.87 R27.2
N$57
  Bottom 0.152: DS2.4 101.55,100.38 101.55,105.72 92.25,115.01 92.25,120.5 86.61,126.14 72.59,126.14 35.71,89.26 30.53,89.26 25.2,94.59 25.2,95.2 24.43,95.96 21.54,95.96 19.56,97.94 17.42,97.94 14.38,94.89 14.07,94.89 R26.2
N$58  (via drill 0.35)
  Top 0.152: v91.19,92.91 98.96,85.14 DS2.6 | v89.66,93.83 66.5,93.83 62.84,90.17 v30.99,90.17
  Bottom 0.152: v91.19,92.91 90.58,92.91 v89.66,93.83 | v30.99,90.17 26.11,95.05 26.11,96.88 23.98,99.01 22.76,99.01 14.07,107.7 14.07,108.61 R25.2
N$59  (via drill 0.35)
  Top 0.152: v95,113.18 84.94,113.18 79.6,118.52 34.8,118.52 29.31,124 20.32,124 19.1,122.78 R24.2
  Bottom 0.152: v95,113.18 100.48,113.18 102.92,110.74 102.92,99.16 101.7,97.94 101.7,85.14 DS2.7
N$60  (via drill 0.35)
  Top 0.152: v100.94,119.43 100.63,119.13 100.63,111.2 109.17,102.67 109.17,100.38 DS2.1
  Bottom 0.152: v100.94,119.43 100.48,119.43 92.1,127.81 27.79,127.81 10.72,110.74 10.72,70.05 13.92,66.85 R28.2
N$61  (via drill 0.35)
  Top 0.152: v92.41,81.18 68.02,81.18 65.13,78.28 v47.75,78.28 | v30.84,65.18 v32.05,66.4
  Bottom 0.152: v92.41,81.18 102.16,81.18 105.97,84.99 106.58,84.99 DS2.9 | v47.75,78.28 43.94,78.28 v32.05,66.4 | v30.84,65.18 30.53,65.18 19.25,53.9 18.64,53.9 16.82,52.07 16.82,43.99 14.07,41.25 R29.1
N$62  (via drill 0.35)
  Top 0.152: v45.31,68.99 v89.81,68.99 | v19.56,32.11 18.95,32.11 14.07,27.23 R30.1
  Bottom 0.152: v89.81,68.99 92.1,71.27 92.1,71.43 98.5,77.83 101.4,77.83 108.56,84.99 109.17,84.99 DS2.10 | v45.31,68.99 41.66,68.99 28.25,55.58 28.25,53.75 21.54,47.04 21.54,34.09 v19.56,32.11
N$63  (via drill 0.35)
  Top 0.152: v79.3,91.39 78.69,92 78.69,92.61 78.99,92.91 90.27,92.91 97.59,100.23 98.96,100.23 DS2.5 | v57.66,94.74 54.61,94.74 48.67,100.69 v24.28,100.69
  Bottom 0.152: v79.3,91.39 79.91,92 79.91,92.61 77.77,94.74 v57.66,94.74 | v24.28,100.69 14.07,110.9 R31.1
N$64  (via drill 0.35)
  Top 0.152: v98.04,127.05 v72.14,127.05 | v119.99,103.89 122.28,101.6 7SEG/LEDS.1
  Bottom 0.152: v72.14,127.05 30.23,127.05 19.1,115.93 19.1,111.05 R24.1 | v98.04,127.05 101.7,123.39 101.7,122.17 v119.99,103.89
N$65  (via drill 0.35)
  Top 0.152: v109.93,102.51 122.28,90.17 7SEG/LEDS2.1
  Bottom 0.152: v109.93,102.51 109.93,104.65 101.09,113.49 96.98,113.49 96.52,113.94 96.52,117.15 91.64,122.02 91.64,123.7 87.83,127.51 73.51,127.51 35.56,89.56 30.68,89.56 25.81,94.44 25.81,96.72 24.28,98.25 17.27,98.25 16.05,97.03 14.07,97.03 R25.1
N$66  (via drill 0.35)
  Top 0.152: v31.75,79.2 31.75,78.74 39.52,70.97 41.96,70.97 52.78,60.15 58.57,60.15 59.49,59.23 v99.72,59.23
  Bottom 0.152: v31.75,79.2 19.25,79.2 15.44,83.01 14.07,83.01 R26.1 | v99.72,59.23 119.23,78.74 7SEG/LEDS3.1
N$67  (via drill 0.35)
  Top 0.152: v17.27,65.79 14.07,68.99 R27.1 | v99.42,76 v52.02,76
  Bottom 0.152: v17.27,65.79 33.88,65.79 44.09,76 v52.02,76 | v99.42,76 99.42,72.49 91.19,64.26 91.19,63.65 96.83,58.01 102.92,58.01 112.22,67.31 7SEG/LEDS4.1
N$68  (via drill 0.35)
  Top 0.152: v13.61,43.38 13.61,42.93 23.22,33.33 60.55,33.33 66.65,27.23 81.43,27.23 81.74,27.53 87.22,27.53 87.53,27.23 88.59,27.23 88.9,27.53 90.58,27.53 91.03,27.99 91.03,42.16 90.12,43.08 88.75,43.08 88.59,43.23 88.59,45.06 88.75,45.21 107.04,45.21 111.61,40.64 116.18,40.64 124.56,49.02 v125.02,49.02
  Bottom 0.152: v13.61,43.38 13,43.99 13,53.29 13.92,54.2 13.92,54.97 R28.1 | v125.02,49.02 125.02,53.29 122.43,55.88 7SEG/LEDS5.1
N$69  (via drill 0.35)
  Top 0.152: v110.54,84.07 110.54,68.38 119.23,59.69 v119.23,49.02
  Bottom 0.152: v110.54,84.07 110.54,111.96 101.24,121.26 100.79,121.26 93.93,128.12 23.06,128.12 17.73,122.78 14.07,122.78 R31.2 | v119.23,49.02 119.23,47.5 122.28,44.45 7SEG/LEDS6.1
N$70  (via drill 0.35)
  Top 0.152: v20.93,37.59 65.28,37.59 73.81,29.06 v85.7,29.06
  Bottom 0.152: v20.93,37.59 18.49,37.59 17.27,38.81 14.07,38.81 R30.2 | v85.7,29.06 87.53,27.23 88.59,27.23 88.9,27.53 116.79,27.53 122.28,33.02 7SEG/LEDS7.1
N$71  (via drill 0.35)
  Top 0.152: v47.14,47.65 44.09,50.7 19.86,50.7 17.73,52.83 14.07,52.83 R29.2 | v87.83,27.84 v66.95,27.84
  Bottom 0.152: v66.95,27.84 v47.14,47.65 | v87.83,27.84 114.81,27.84 121.67,34.7 123.04,34.7 124.41,33.33 124.41,23.57 122.43,21.59 7SEG/LEDS8.1
N$72
  Top 0.152: D7.2 100.33,106.17 105.66,100.84 105.66,99.31 124.56,80.42 127.61,80.42 129.29,78.74 129.29,35.31 131.57,33.02 7SEG/LEDS7.3
N$73
  Top 0.152: D6.2 107.95,106.93 129.59,85.29 129.59,46.43 131.57,44.45 7SEG/LEDS6.3
N$75
  Top 0.152: D1.2 146.05,108.61 135.53,98.09 135.53,59.69 131.72,55.88 7SEG/LEDS5.3
N$76
  Top 0.152: D2.2 138.43,101.45 135.23,98.25 135.23,70.81 131.72,67.31 7SEG/LEDS4.3
N$77
  Bottom 0.152: D3.2 130.81,104.8 133.4,102.21 133.4,80.42 131.72,78.74 7SEG/LEDS3.3
N$78
  Bottom 0.152: D4.2 123.19,112.88 130.05,106.02 130.05,91.69 131.57,90.17 7SEG/LEDS2.3
N$79
  Top 0.152: D5.2 115.57,117.6 131.57,101.6 7SEG/LEDS.3
N$80  (via drill 0.35)
  Top 0.152: v37.69,80.72 44.25,80.72 50.19,74.78 87.68,74.78 111.91,50.55 v118.62,50.55 | v137.21,39.73 144.37,32.56 144.37,32.26 v147.12,29.52
  Bottom 0.152: v37.69,80.72 30.68,80.72 29.77,79.81 23.67,79.81 22.76,80.72 22.76,84.23 23.06,84.53 23.06,92.15 19.1,96.11 19.1,96.88 R18.1 | v118.62,50.55 129.44,39.73 v137.21,39.73 | v147.12,29.52 150.62,33.02 IO/7SEG7.3
N$81  (via drill 0.35)
  Top 0.152: v30.53,126.44 147.27,126.44 152.76,120.96 152.76,46.43 150.77,44.45 IO/7SEG6.3
  Bottom 0.152: R17.1 24.13,113.34 22.91,114.55 22.91,118.82 v30.53,126.44
N$82  (via drill 0.35)
  Top 0.152: v87.07,32.56 70.76,32.56 64.82,38.51 35.41,38.51 34.8,37.9 28.85,37.9 25.65,41.1 24.13,41.1 R15.1 | v111.15,29.97 121.51,29.97 124.56,26.92 142.85,26.92 v143.15,26.62
  Bottom 0.152: v87.07,32.56 108.56,32.56 v111.15,29.97 | v143.15,26.62 143.46,26.92 143.61,26.92 149.1,32.41 149.1,54.36 150.62,55.88 IO/7SEG5.3
N$83  (via drill 0.35)
  Top 0.152: v41.66,72.64 87.22,72.64 v94.39,65.48 | v134.62,92.3 v123.49,92.3 | v147.12,85.45 147.12,84.99 149.1,83.01 149.1,68.83 150.62,67.31 IO/7SEG4.3
  Bottom 0.152: v41.66,72.64 24.13,55.12 R14.1 | v94.39,65.48 95.3,65.48 122.12,92.3 v123.49,92.3 | v134.62,92.3 135.38,92.3 142.24,85.45 v147.12,85.45
N$84  (via drill 0.35)
  Top 0.152: v15.9,53.44 17.42,54.97 18.95,54.97 R21.1
  Bottom 0.152: v15.9,53.44 15.9,44.76 13.92,42.77 13.77,42.77 12.7,41.71 12.7,36.68 16.66,32.72 16.66,17.78 27.18,7.26 132.64,7.26 145.29,19.91 148.95,19.91 150.62,21.59 IO/7SEG8.3
N$85  (via drill 0.35)
  Top 0.152: v21.54,17.32 12.85,17.32 12.09,16.56 7.67,16.56 GPIO'S.9
  Bottom 0.152: v21.54,17.32 22,17.32 31.75,7.57 127.3,7.57 141.33,21.59 IO/7SEG8.1
N$86  (via drill 0.35)
  Top 0.152: v20.78,19 7.67,19 GPIO'S.8 | v144.68,23.57 144.37,23.88 144.22,23.88 143.76,24.33 143.76,30.73 141.48,33.02 IO/7SEG7.1
  Bottom 0.152: v20.78,19 29.92,9.86 106.73,9.86 107.64,10.77 110.24,10.77 112.06,12.6 130.05,12.6 141.02,23.57 v144.68,23.57
N$87  (via drill 0.35)
  Top 0.152: v15.75,25.4 21.84,25.4 32.36,14.88 83.87,14.88 89.2,20.22 106.27,20.22 107.64,21.59 110.85,21.59 112.06,22.81 120.29,22.81 123.19,25.71 133.4,25.71 v133.71,25.4
  Bottom 0.152: v15.75,25.4 15.75,24.94 8.74,17.93 6.45,17.93 5.84,18.54 5.84,19.46 7.52,21.13 7.52,21.59 GPIO'S.7 | v133.71,25.4 134.16,25.4 140.11,31.34 146.66,31.34 147.73,32.41 147.73,45.06 146.66,46.13 143.15,46.13 141.48,44.45 IO/7SEG6.1
N$88  (via drill 0.35)
  Top 0.152: v13.61,31.04 15.29,32.72 26.87,32.72 v27.18,32.41 | v28.7,33.93 68.48,33.93 73.96,28.45 88.14,28.45 88.75,27.84 90.42,27.84 90.73,28.14 90.73,39.88 89.97,40.64 88.75,40.64 88.29,41.1 88.29,45.21 88.59,45.52 109.32,45.52 111.76,43.08 117.25,43.08 v123.34,49.17
  Bottom 0.152: v13.61,31.04 12.7,30.12 12.7,29.52 7.67,24.49 7.67,24.18 GPIO'S.6 | v28.7,33.93 v27.18,32.41 | v123.34,49.17 123.95,49.17 124.71,48.41 133.86,48.41 141.33,55.88 IO/7SEG5.1
N$89  (via drill 0.35)
  Top 0.152: v20.78,22.81 18.8,24.79 18.19,24.79 17.88,24.49 14.22,24.49 12.09,26.62 7.67,26.62 GPIO'S.5 | v123.8,29.52 125.78,29.52 128.68,32.41 v128.68,50.55 | v137.82,59.69 137.82,63.8 141.33,67.31 IO/7SEG4.1
  Bottom 0.152: v20.78,22.81 21.23,22.81 30.99,13.06 60.55,13.06 62.99,10.62 87.22,10.62 89.2,12.6 96.06,12.6 108.86,25.4 119.69,25.4 v123.8,29.52 | v137.82,59.69 v128.68,50.55
N$90  (via drill 0.35)
  Top 0.152: v88.14,14.88 106.73,14.88 108.25,16.41 110.85,16.41 112.22,17.78 v144.07,17.78
  Bottom 0.152: R16.2 24.13,28.6 23.06,27.53 23.06,24.64 24.59,23.11 71.53,23.11 71.83,23.42 75.95,23.42 81.74,17.63 83.87,17.63 86.31,15.19 87.83,15.19 v88.14,14.88 | v144.07,17.78 149.25,17.78 152.76,21.29 152.76,62.89 149.1,66.55 149.1,77.22 150.62,78.74 IO/7SEG3.3
N$91  (via drill 0.35)
  Top 0.152: v30.84,109.22 30.84,108.91 21.84,99.92 21.84,98.4 19.1,95.66 19.1,94.89 R19.2 | v70.92,125.83 147.42,125.83 152.45,120.8 152.45,91.85 150.77,90.17 IO/7SEG2.3
  Bottom 0.152: v30.84,109.22 54.3,109.22 v70.92,125.83
N$92  (via drill 0.35)
  Top 0.152: v21.23,78.28 19.1,80.42 19.1,80.72 R20.2 | v77.62,119.74 78.08,119.74 78.38,119.43 87.38,119.43 93.47,125.53 145.29,125.53 147.42,123.39 147.42,104.8 150.62,101.6 IO/7SEG.3
  Bottom 0.152: v21.23,78.28 34.65,78.28 34.95,77.98 35.87,77.98 v77.62,119.74
N$93  (via drill 0.35)
  Top 0.152: v9.5,33.48 9.5,31.34 7.67,29.52 7.67,29.21 GPIO'S.4 | v9.5,38.51 9.5,39.12 5.84,42.77 5.84,43.69 6.76,44.6 16.82,44.6 18.03,45.82 v20.02,45.82 | v52.78,75.39 102.16,75.39 v109.47,68.07
  Bottom 0.152: v9.5,38.51 v9.5,33.48 | v20.02,45.82 20.02,47.35 27.94,55.27 27.94,57.86 45.47,75.39 v52.78,75.39 | v109.47,68.07 120.75,68.07 129.74,77.06 138.58,77.06 140.26,78.74 IO/7SEG3.1
N$94  (via drill 0.35)
  Top 0.152: v5.23,17.63 5.23,13.67 15.14,3.76 130.96,3.76 148.03,20.83 148.03,83.62 141.48,90.17 IO/7SEG2.1
  Bottom 0.152: GPIO'S.3 6.45,30.58 6.3,30.58 5.23,29.52 v5.23,17.63
N$95  (via drill 0.35)
  Top 0.152: v22,18.69 18.03,22.66 6.91,22.66 5.84,23.72 5.84,32.26 7.52,33.93 7.52,34.24 GPIO'S.2 | v123.8,28.6 129.59,28.6 135.99,35 135.99,96.27 141.33,101.6 IO/7SEG.1
  Bottom 0.152: v22,18.69 30.53,10.16 97.59,10.16 106.43,19 110.85,19 112.06,20.22 115.42,20.22 v123.8,28.6
N$96  (via drill 0.35)
  Top 0.152: v82.04,26.92 v82.04,22.96 | v58.88,57.1 v63.6,52.38
  Bottom 0.152: v82.04,22.96 82.04,20.98 85.55,17.48 87.38,17.48 87.99,16.87 87.99,15.95 88.75,15.19 90.12,15.19 91.49,13.82 92.71,13.82 U1.P$42 | v82.04,26.92 82.04,33.93 v63.6,52.38 | v58.88,57.1 58.88,78.74 59.64,79.5 U$1.SCL